# EAGLE board CAN_driver (EAGLE 9.3.1)
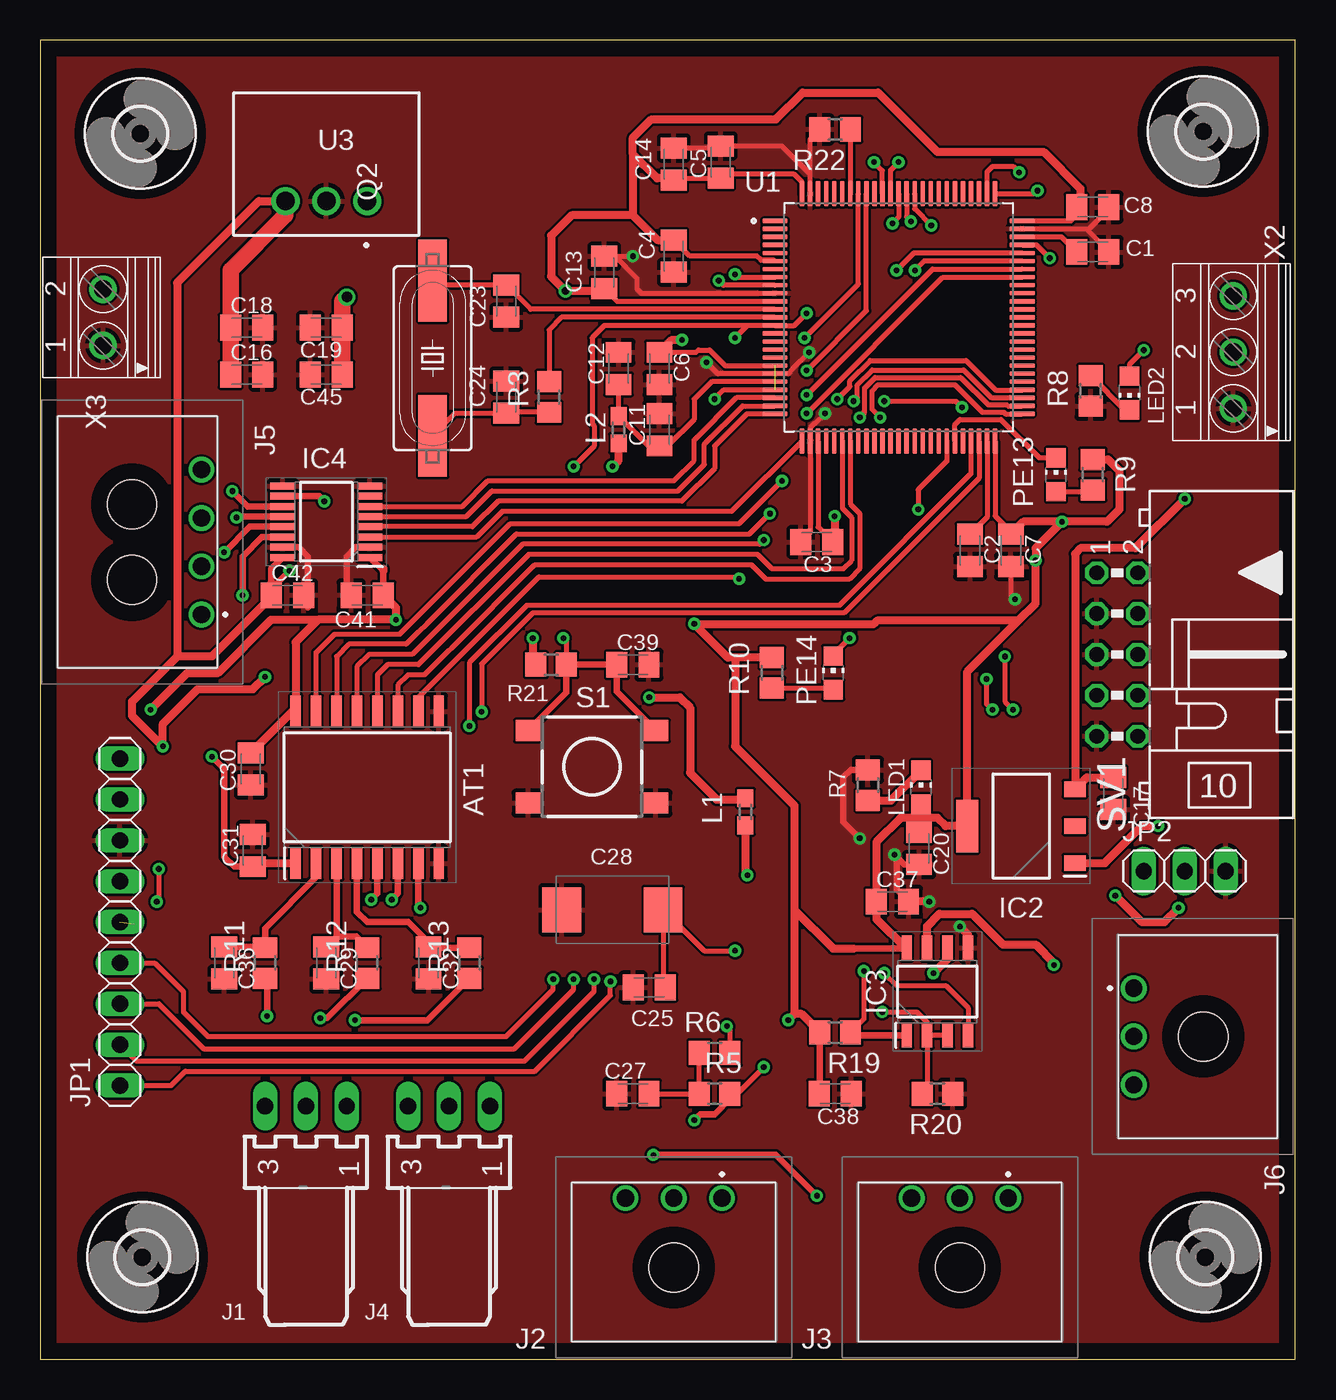
[diagram p0: board, top side]
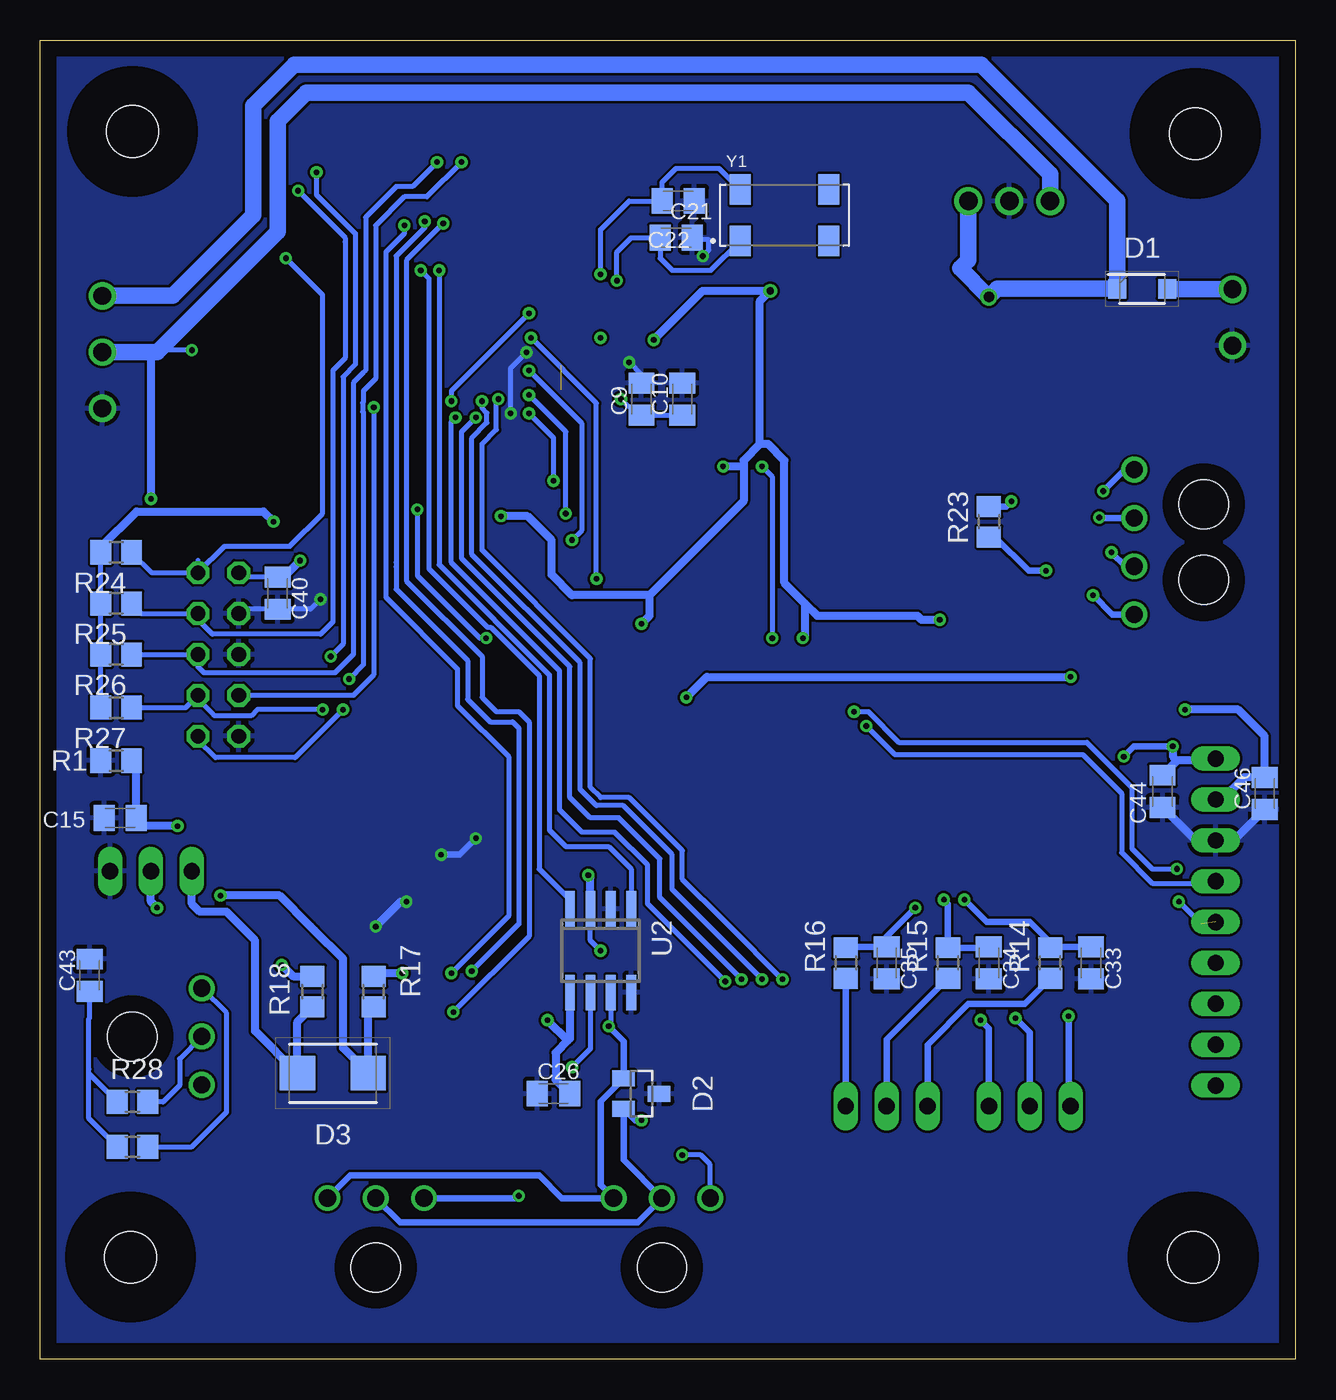
[diagram p1: board, bottom side, seen from below]

Size 78 x 82 mm. Coordinates in mm from the lower left corner, seen from the top.
Outline: 0,0 78,0 78,82 0,82 0,0
Copper layers (1*16): Top 0.035mm / dielectric 1.5mm / Bottom 0.035mm
Design rules "default": minimum track width 6mil, minimum drill 0.35mm, track to track 6mil, track to pad 6mil, pad to pad 6mil, via to via 6mil, smd to smd 6mil, copper to edge 40mil, drill to drill 6mil, minimum pad ring 10mil, minimum via ring 8mil, stop-mask expansion 4mil, vias tented up to drill 0mil, thermal gap 10mil

## Footprints (pad centres in the part's own frame; a part is rotated, then mirrored left to right if it is on the bottom)
SOIC127P1030X265-16N = smd 1.95 x 0.65: 1 -4.725,4.445; 2 -4.725,3.175; 3 -4.725,1.905; 4 -4.725,0.635; 5 -4.725,-0.635; 6 -4.725,-1.905; 7 -4.725,-3.175; 8 -4.725,-4.445; 9 4.725,-4.445; 10 4.725,-3.175; 11 4.725,-1.905; 12 4.725,-0.635; 13 4.725,0.635; 14 4.725,1.905; 15 4.725,3.175; 16 4.725,4.445
C0805K = smd 1.3 x 1.6: 1 -1,0; 2 1,0
SMC_D = smd 2.4 x 2.8: + -3.15,0; - 3.15,0
SODFL3618X143N = smd 1.12 x 1.22: 1 -1.55,0; 2 1.55,0
SOT23 = smd 1 x 1.4: 1 -0.95,-1.1; 2 0.95,-1.1; 3 0,1.1
DIONM5436X261N = smd 2.2 x 2.15: 1 -2.2,0; 2 2.2,0
SOT230P700X180-4N = smd 1.35 x 0.95: 1 -3.35,2.3; 2 -3.35,0; 3 -3.35,-2.3 | smd 1.35 x 3.25: 4 3.35,0
SOIC127P600X175-8N = smd 1.525 x 0.65: 1 -2.712,1.905; 2 -2.712,0.635; 3 -2.712,-0.635; 4 -2.712,-1.905; 5 2.712,-1.905; 6 2.712,-0.635; 7 2.712,0.635; 8 2.712,1.905
SOP64P600X175-16N = smd 1.528 x 0.435: 1 -2.711,2.222; 2 -2.711,1.588; 3 -2.711,0.952; 4 -2.711,0.318; 5 -2.711,-0.318; 6 -2.711,-0.952; 7 -2.711,-1.588; 8 -2.711,-2.222; 9 2.711,-2.222; 10 2.711,-1.588; 11 2.711,-0.952; 12 2.711,-0.318; 13 2.711,0.318; 14 2.711,0.952; 15 2.711,1.588; 16 2.711,2.222
7395-03 = drill 1.016 long: 1 2.54,0; 2 0,0; 3 -2.54,0
436500300 = drill 1.07 pad 1.605: 1 3,3.67; 2 0,3.67; 3 -3,3.67 | hole 3.05: 0,-0.65
436500400 = drill 1.07 pad 1.605: 1 4.5,3.67; 2 1.5,3.67; 3 -1.5,3.67; 4 -4.5,3.67 | hole 3.05: -2.35,-0.65; 2.35,-0.65
1X09 = drill 1.016 long: 1 -10.16,0; 2 -7.62,0; 3 -5.08,0; 4 -2.54,0; 5 0,0; 6 2.54,0; 7 5.08,0; 8 7.62,0; 9 10.16,0
1X03 = drill 1.016 long: 1 -2.54,0; 2 0,0; 3 2.54,0
L1608 = smd 1.1 x 1: 1 -0.85,0; 2 0.85,0
CHIP-LED0805 = smd 1.2 x 1.2: A 0,-1.05; C 0,1.05
SM49 = smd 5.08 x 1.778: 1 -4.826,0; 2 4.826,0
R0805 = smd 1.3 x 1.5: 1 -0.95,0; 2 0.95,0
DTSM-6 = smd 1.55 x 1.3: 1 -3.975,2.25; 2 3.975,2.25; 3 -3.975,-2.25; 4 3.975,-2.25
ML10L = drill 0.914 octagon: 1 -5.08,-1.27; 2 -5.08,1.27; 3 -2.54,-1.27; 4 -2.54,1.27; 5 0,-1.27; 6 0,1.27; 7 2.54,-1.27; 8 2.54,1.27; 9 5.08,-1.27; 10 5.08,1.27
QFP50P1600X1600X160-100N = smd 1.56 x 0.28: 1 -7.68,6; 2 -7.68,5.5; 3 -7.68,5; 4 -7.68,4.5; 5 -7.68,4; 6 -7.68,3.5; 7 -7.68,3; 8 -7.68,2.5; 9 -7.68,2; 10 -7.68,1.5; 11 -7.68,1; 12 -7.68,0.5; 13 -7.68,0; 14 -7.68,-0.5; 15 -7.68,-1; 16 -7.68,-1.5; 17 -7.68,-2; 18 -7.68,-2.5; 19 -7.68,-3; 20 -7.68,-3.5; 21 -7.68,-4; 22 -7.68,-4.5; 23 -7.68,-5; 24 -7.68,-5.5; 25 -7.68,-6; 51 7.68,-6; 52 7.68,-5.5; 53 7.68,-5; 54 7.68,-4.5; 55 7.68,-4; 56 7.68,-3.5; 57 7.68,-3; 58 7.68,-2.5; 59 7.68,-2; 60 7.68,-1.5; 61 7.68,-1; 62 7.68,-0.5; 63 7.68,0; 64 7.68,0.5; 65 7.68,1; 66 7.68,1.5; 67 7.68,2; 68 7.68,2.5; 69 7.68,3; 70 7.68,3.5; 71 7.68,4; 72 7.68,4.5; 73 7.68,5; 74 7.68,5.5; 75 7.68,6 | smd 0.28 x 1.56: 26 -6,-7.68; 27 -5.5,-7.68; 28 -5,-7.68; 29 -4.5,-7.68; 30 -4,-7.68; 31 -3.5,-7.68; 32 -3,-7.68; 33 -2.5,-7.68; 34 -2,-7.68; 35 -1.5,-7.68; 36 -1,-7.68; 37 -0.5,-7.68; 38 0,-7.68; 39 0.5,-7.68; 40 1,-7.68; 41 1.5,-7.68; 42 2,-7.68; 43 2.5,-7.68; 44 3,-7.68; 45 3.5,-7.68; 46 4,-7.68; 47 4.5,-7.68; 48 5,-7.68; 49 5.5,-7.68; 50 6,-7.68; 76 6,7.68; 77 5.5,7.68; 78 5,7.68; 79 4.5,7.68; 80 4,7.68; 81 3.5,7.68; 82 3,7.68; 83 2.5,7.68; 84 2,7.68; 85 1.5,7.68; 86 1,7.68; 87 0.5,7.68; 88 0,7.68; 89 -0.5,7.68; 90 -1,7.68; 91 -1.5,7.68; 92 -2,7.68; 93 -2.5,7.68; 94 -3,7.68; 95 -3.5,7.68; 96 -4,7.68; 97 -4.5,7.68; 98 -5,7.68; 99 -5.5,7.68; 100 -6,7.68
SO8 = smd 2.2 x 0.6: 1 -2.6,1.905; 2 -2.6,0.635; 3 -2.6,-0.635; 4 -2.6,-1.905; 5 2.6,-1.905; 6 2.6,-0.635; 7 2.6,0.635; 8 2.6,1.905
AMSR1-7805-NZ = drill 1.15 pad 1.75: 1 -2.54,-2.15; 2 0,-2.15; 3 2.54,-2.15
3,2 = hole 3.2: 0,0
1751251 = drill 1.1 pad 1.7: 1 -3.5,-0.1; 2 0,-0.1; 3 3.5,-0.1
1751248 = drill 1.1 pad 1.7: 1 -1.75,-0.1; 2 1.75,-0.1
XTAL_ECS-.327-6-17X-C-TR = smd 1.3 x 1.9: 1 -2.75,-1.6; 2 2.75,-1.6; 3 2.75,1.6; 4 -2.75,1.6

## Placement (x,y rotation side)
AT1  ISO7760DWR  [SOIC127P1030X265-16N]  20.32,35.56 90 top
C1  2,2u  [C0805K]  65.41,68.83 0 top
C2  2,2u  [C0805K]  57.78,50.29 270 top
C3  100n  [C0805K]  48.26,50.8 180 top
C4  100n  [C0805K]  39.37,68.58 270 top
C5  100n  [C0805K]  42.29,74.42 90 top
C6  100n  [C0805K]  38.48,61.59 270 top
C7  100n  [C0805K]  60.33,50.29 270 top
C8  100n  [C0805K]  65.41,71.63 0 top
C9  100n  [C0805K]  40.64,59.69 90 bottom
C10  1u  [C0805K]  38.1,59.69 90 bottom
C11  100n  [C0805K]  38.48,57.78 90 top
C12  1u  [C0805K]  35.94,61.59 90 top
C13  100n  [C0805K]  35.05,67.56 90 top
C14  10u  [C0805K]  39.37,74.3 90 top
C15  20p  [C0805K]  73.03,33.66 180 bottom
C16  10u  [C0805K]  12.83,61.21 0 top
C17  1u  [C0805K]  66.67,35.18 270 top
C18  10n  [C0805K]  12.83,64.14 0 top
C19  10u  [C0805K]  17.78,64.14 180 top
C20  2,2u  [C0805K]  54.61,31.75 270 top
C21  6,8p  [C0805K]  38.48,69.72 0 bottom
C22  6,8p  [C0805K]  38.35,72.01 0 bottom
C23  22p  [C0805K]  28.96,65.79 90 top
C24  22p  [C0805K]  28.96,59.82 270 top
C25  100nF  [C0805K]  37.85,23.11 0 top
C26  100nF  [C0805K]  46.1,16.51 0 bottom
C27  4.7nF  [C0805K]  36.83,16.51 180 top
C28  22uF / 16V  [SMC_D]  35.56,27.94 180 top
C29  220p  [C0805K]  17.78,24.64 270 top
C30  100n  [C0805K]  13.08,36.7 270 top
C31  100n  [C0805K]  13.21,31.62 90 top
C32  220p  [C0805K]  24.13,24.64 270 top
C33  220p  [C0805K]  12.7,24.64 270 bottom
C34  220p  [C0805K]  19.05,24.64 270 bottom
C35  220p  [C0805K]  25.4,24.64 270 bottom
C36  220p  [C0805K]  11.43,24.64 270 top
C37  100n  [C0805K]  52.96,28.45 0 top
C38  100n  [C0805K]  49.4,16.51 0 top
C39  100n  [C0805K]  36.83,43.18 0 top
C40  100n  [C0805K]  63.25,47.62 270 bottom
C41  100n  [C0805K]  20.32,47.5 180 top
C42  100n  [C0805K]  15.37,47.5 0 top
C43  4.7nF  [C0805K]  74.93,23.88 90 bottom
C44  100n  [C0805K]  8.26,35.31 90 bottom
C45  10n  [C0805K]  17.78,61.21 180 top
C46  100n  [C0805K]  1.91,35.18 90 bottom
D1  SS34FA  [SODFL3618X143N]  9.53,66.55 0 bottom
D2  PESD1CAN  [SOT23]  40.64,16.51 270 bottom
D3  SMBJ43CA  [DIONM5436X261N]  59.82,17.78 180 bottom
IC2  LT3080EST#PBF  [SOT230P700X180-4N]  60.96,33.15 180 top
IC3  SN65HVD1781AQDRQ1  [SOIC127P600X175-8N]  55.75,22.86 90 top
IC4  ISO7740DBQ  [SOP64P600X175-16N]  17.78,52.07 180 top
J1  22-05-7038-03  [7395-03]  16.51,15.75 0 top
J2  43650-0300  [436500300]  39.37,6.35 0 top
J3  43650-0300  [436500300]  57.15,6.35 0 top
J4  22-05-7038-03  [7395-03]  25.4,15.75 0 top
J5  43650-0400  [436500400]  6.35,50.8 270 top
J6  43650-0300  [436500300]  71.63,20.07 90 top
JP1  [1X09]  4.95,27.18 90 top
JP2  [1X03]  71.12,30.35 0 top
L1  BLM18PG600  [L1608]  43.81,34.04 90 top
L2  BLM18PG600  [L1608]  35.94,57.78 90 top
LED1  [CHIP-LED0805]  54.74,35.56 0 top
LED2  [CHIP-LED0805]  67.69,60.07 180 top
PE13  [CHIP-LED0805]  63.12,54.99 0 top
PE14  [CHIP-LED0805]  49.28,42.67 0 top
Q2  16MHz  [SM49]  24.38,62.23 270 top
R1  330k  [R0805]  73.28,37.21 0 bottom
R3  220  [R0805]  31.62,59.82 90 top
R5  62  [R0805]  41.91,16.51 0 top
R6  62  [R0805]  41.91,19.05 0 top
R7  510  [R0805]  51.44,35.69 270 top
R8  510  [R0805]  65.28,60.2 90 top
R9  510  [R0805]  65.41,54.99 90 top
R10  510  [R0805]  45.47,42.67 90 top
R11  2k  [R0805]  13.97,24.64 90 top
R12  2k  [R0805]  20.32,24.64 90 top
R13  2k  [R0805]  26.67,24.64 90 top
R14  2k  [R0805]  15.24,24.64 90 bottom
R15  2k  [R0805]  21.59,24.64 90 bottom
R16  2k  [R0805]  27.94,24.64 90 bottom
R17  10k  [R0805]  57.28,22.86 270 bottom
R18  10k  [R0805]  61.09,22.86 270 bottom
R19  10k  [R0805]  49.4,20.32 180 top
R20  10k  [R0805]  55.75,16.51 180 top
R21  10k  [R0805]  31.75,43.18 180 top
R22  510  [R0805]  49.4,76.45 180 top
R23  4,7k  [R0805]  19.05,52.07 270 bottom
R24  10k  [R0805]  73.28,50.16 180 bottom
R25  10k  [R0805]  73.28,46.99 180 bottom
R26  10k  [R0805]  73.28,43.81 180 bottom
R27  10k  [R0805]  73.28,40.51 180 bottom
R28  62  [R0805]  72.26,16 0 bottom
R29  62  [R0805]  72.26,13.21 0 bottom
S1  DTSM-6  [DTSM-6]  34.29,36.83 0 top
SV1  [ML10L]  66.93,43.81 270 top
U1  STM32F407VGT6  [QFP50P1600X1600X160-100N]  53.34,64.77 0 top
U2  TLE7251VSO8  [SO8]  43.18,25.4 270 bottom
U3  AMSR1-7805-NZ  [AMSR1-7805-NZ]  17.78,69.85 180 top
U$5  [3,2]  6.22,76.2 0 top
U$6  [3,2]  72.26,76.33 0 top
U$7  [3,2]  72.39,6.35 0 top
U$8  [3,2]  6.35,6.35 0 top
X2  1751251  [1751251]  74.04,62.61 90 top
X3  1751248  [1751248]  3.81,64.77 90 top
Y1  ECS-.327-6-17X-C-TR  [XTAL_ECS-.327-6-17X-C-TR]  31.75,71.12 0 bottom

## Library data of the parts
AT1 = SamacSys_Parts; DESCRIPTION: High Speed, Robust EMC Six-Channel Digital Isolators; HEIGHT: 2.65mm; MANUFACTURER_NAME: Texas Instruments; MANUFACTURER_PART_NUMBER: ISO7760DWR; MOUSER_PART_NUMBER: 595-ISO7760DWR; MOUSER_PRICE-STOCK: https://www.mouser.com/Search/Refine.aspx?Keyword=595-ISO7760DWR
C1-C46 = rcl; SPICEPREFIX: C
D1 = SamacSys_Parts; DESCRIPTION: ON SEMICONDUCTOR - SS34FA - SCHOTTKY RECT, AEC-Q101, 40V, SOD-123FA; HEIGHT: 1.43mm; MANUFACTURER_NAME: ON Semiconductor; MANUFACTURER_PART_NUMBER: SS34FA; MOUSER_PART_NUMBER: 512-SS34FA; MOUSER_PRICE-STOCK: https://www.mouser.com/Search/Refine.aspx?Keyword=512-SS34FA
D2 = diode
D3 = SamacSys_Parts; DESCRIPTION: Littelfuse SMBJ43CA, Bi-Directional TVS Diode, 600W, 2-Pin DO-214AA; HEIGHT: 2.61mm; MANUFACTURER_NAME: LITTELFUSE; MANUFACTURER_PART_NUMBER: SMBJ43CA; MOUSER_PART_NUMBER: 576-SMBJ43CA; MOUSER_PRICE-STOCK: https://www.mouser.com/Search/Refine.aspx?Keyword=576-SMBJ43CA
IC2 = SamacSys_Parts; DESCRIPTION: Adjust single Resistor 1.1A LDO LT3080 LT3080EST#PBF, Low Dropout Voltage Regulator, Adjustable 1.1A, 0 30 V, 4-Pin SOT-223; HEIGHT: 1.8mm; MANUFACTURER_NAME: Linear Technology; MANUFACTURER_PART_NUMBER: LT3080EST#PBF; MOUSER_PART_NUMBER: 584-LT3080EST#PBF; MOUSER_PRICE-STOCK: https://www.mouser.com/Search/Refine.aspx?Keyword=584-LT3080EST%23PBF
IC3 = SamacSys_Parts; DESCRIPTION: Automotive, Fault-Protected RS-485 Transceivers With 3.3-V to 5-V Operation; HEIGHT: 1.75mm; MANUFACTURER_NAME: Texas Instruments; MANUFACTURER_PART_NUMBER: SN65HVD1781AQDRQ1; MOUSER_PART_NUMBER: 595-N65HVD1781AQDRQ1; MOUSER_PRICE-STOCK: https://www.mouser.com/Search/Refine.aspx?Keyword=595-N65HVD1781AQDRQ1
IC4 = SamacSys_Parts; DESCRIPTION: High-Speed, Low-Power, Robust EMC Quad-Channel Digital Isolator; HEIGHT: 1.75mm; MANUFACTURER_NAME: Texas Instruments; MANUFACTURER_PART_NUMBER: ISO7740DBQ; MOUSER_PART_NUMBER: 595-ISO7740DBQ; MOUSER_PRICE-STOCK: https://www.mouser.com/Search/Refine.aspx?Keyword=595-ISO7740DBQ
J1 J4 = con-molex; MF: MOLEX; OC_FARNELL: unknown; OC_NEWARK: unknown
J2 J3 J6 = SamacSys_Parts; DESCRIPTION: MICRO-FIT (3.0) SINGLE ROW/RIGHT ANGLE THRU HOLD/PEGS/TRAY; HEIGHT: 5mm; MANUFACTURER_NAME: Molex; MANUFACTURER_PART_NUMBER: 43650-0300; MOUSER_PART_NUMBER: 538-43650-0300; MOUSER_PRICE-STOCK: https://www.mouser.com/Search/Refine.aspx?Keyword=538-43650-0300
J5 = SamacSys_Parts; DESCRIPTION: Molex MICRO-FIT 3.0 Series, Series Number 43650, 3mm Pitch 4 Way 1 Row Right Angle PCB Header, Solder Termination, 5A; HEIGHT: mm; MANUFACTURER_NAME: Molex; MANUFACTURER_PART_NUMBER: 43650-0400; MOUSER_PART_NUMBER: 538-43650-0400; MOUSER_PRICE-STOCK: https://www.mouser.com/Search/Refine.aspx?Keyword=538-43650-0400
JP1 JP2 = pinhead
L1 L2 = PDFerr
LED1 LED2 PE13 PE14 = led
Q2 = crystal; OC_FARNELL: unknown; OC_NEWARK: unknown
R1 R3 R5-R29 = rcl; SPICEPREFIX: R
S1 = switch-tact
SV1 = con-harting-ml; OC_FARNELL: unknown; OC_NEWARK: unknown
U1 = STM32F407VGT6; AVAILABILITY: Unavailable; DESCRIPTION: STM32 Series 32-bit 1 MB Flash 192 kB RAM ARM Based Microcontroller - LQFP-100; MF: STMicroelectronics; MP: STM32F407VGT6; PACKAGE: LQFP-100 STMicroelectronics; PRICE: None
U2 = TLE7251
U3 = AMSR1-7805-NZ; DESCRIPTION: Up to 12 Watt | DC-DC Switching Regulator; HEIGHT: mm; MANUFACTURER_NAME: AIM; MANUFACTURER_PART_NUMBER: AMSR1-7805-NZ
U$5-U$8 = holes
X2 X3 = con-phoenix-350; OC_FARNELL: unknown; OC_NEWARK: unknown
Y1 = ECS-.327-6-17X-C-TR; AVAILABILITY: Unavailable; DESCRIPTION: ECX306X Series 32.76 kHz ±10 ppm 6 pF -40 to +85 °C Surface Mount Crystal; MF: ECS Inc.; MP: ECS-.327-6-17X-C-TR; PACKAGE: 4-4 ECS International; PRICE: None

## Nets
+3V3: AT1.16 C3.1 C4.1 C5.1 C6.1 C7.1 C8.1 C9.1 C10.1 C13.1 C14.1 C20.1 C26.2 C30.1 C37.1 C38.1 C40.1 C41.1 C46.2 IC2.4 IC3.8 IC4.1 JP1.8 L2.1 LED1.A R9.2 R10.2 R19.2 R21.2 R24.2 R25.2 R26.2 R27.2 SV1.1 U1.6 U1.11 U1.19 U1.22 U1.28 U1.50 U1.75 U1.100 U2.5
+5V: AT1.1 C16.1 C17.1 C18.1 C31.1 C42.1 C44.2 IC2.3 IC4.16 JP1.9 L1.2 LED2.A R23.2 U3.3 X2.2
+12V: C19.1 C45.1 D1.1 U3.1 X2.3
BLUE_RXD: JP1.5 U1.48
BLUE_TXD: JP1.6 U1.47
CAN_H: D2.1 J2.1 J3.1 R6.2 U2.7
CAN_L: D2.2 J2.2 J3.2 R5.2 U2.6
CAN_RXD: U1.70 U2.4
CAN_TXD: U1.71 U2.1
CANH_TR: J6.1 R29.2
CANL_TR: J6.2 R28.2
EN1A: AT1.2 C36.1 R11.2
EN1B: AT1.3 C29.1 R12.2
EN1C: AT1.4 C32.1 R13.2
EN2A: AT1.5 C33.1 R14.2
EN2B: AT1.6 C34.1 R15.2
EN2C: AT1.7 C35.1 R16.2
GND: AT1.8 AT1.9 C1.2 C2.2 C3.2 C4.2 C5.2 C6.2 C7.2 C8.2 C9.2 C10.2 C11.2 C12.2 C13.2 C14.2 C15.2 C16.2 C17.2 C18.2 C19.2 C20.2 C21.2 C22.2 C23.1 C24.1 C25.1 C26.1 C27.2 C28.- C29.2 C30.2 C31.2 C32.2 C33.2 C34.2 C35.2 C36.2 C37.2 C38.2 C39.2 C40.2 C41.2 C42.2 C43.2 C44.1 C45.2 C46.1 D2.3 IC3.5 IC4.2 IC4.8 IC4.9 IC4.15 JP1.7 JP2.3 R1.1 R7.1 R8.1 R20.1 R22.2 S1.3 S1.4 SV1.3 SV1.5 SV1.9 U1.10 U1.20 U1.27 U1.74 U1.99 U2.2 U2.8 U3.2 X2.1 X3.1
LED1: PE13.C U1.45
LED2: PE14.C U1.44
MCU_EN1A: AT1.15 U1.68
MCU_EN1B: AT1.14 U1.69
MCU_EN1C: AT1.13 U1.92
MCU_EN2A: AT1.12 U1.31
MCU_EN2B: AT1.11 U1.32
MCU_EN2C: AT1.10 U1.93
N$1: C1.1 U1.73
N$2: C2.1 U1.49
N$3: C22.1 U1.8 Y1.4
N$4: C11.1 C12.1 L2.2 U1.21
N$5: C21.1 U1.9 Y1.1
N$6: D1.2 X3.2
N$7: C15.1 IC2.1 R1.2
N$9: R3.2 U1.13
N$10: C23.2 Q2.1 U1.12
N$11: J2.3 J3.3
N$12: C24.2 Q2.2 R3.1
N$13: LED1.C R7.2
N$14: LED2.C R8.2
N$15: PE13.A R9.1
N$16: PE14.A R10.1
N$17: J1.3 R11.1
N$20: J1.2 R12.1
N$21: IC3.7 R18.1
N$22: J1.1 R13.1
N$23: IC3.6 R17.1
N$24: J4.3 R14.1
N$25: R22.1 U1.94
N$26: J4.2 R15.1
N$27: IC4.10 R23.1
N$28: J4.1 R16.1
N$29: IC4.13 J5.2
N$30: IC4.12 J5.3
N$31: IC4.14 J5.1
N$32: IC4.11 J5.4
N$33: C43.1 R28.1 R29.1
N$59: C27.1 R5.1 R6.1
N$113: C25.2 C28.+ L1.1 U2.3
NRST: C39.1 R21.1 S1.1 S1.2 SV1.7 U1.14
PWM1: IC4.3 U1.26
PWM2: IC4.4 U1.25
PWM3: IC4.5 U1.24
PWM4: IC4.6 U1.23
RS485_A: D3.1 JP2.2 R17.2
RS485_B: D3.2 JP2.1 R18.2
SPI_MISO: JP1.3 U1.53
SPI_MOSI: JP1.4 U1.54
SPI_NSS: JP1.1 U1.51
SPI_SCK: JP1.2 U1.52
TCK/SWCLK: R25.1 SV1.4 U1.76
TDI: R27.1 SV1.8 U1.77
TDO/SWO: R26.1 SV1.6 U1.89
TMS/SWDIO: R24.1 SV1.2 U1.72
TRST: SV1.10 U1.90
UART_DIR: IC3.2 IC3.3 R20.2 U1.88
UART_RXD: IC3.1 R19.1 U1.87
UART_TXD: IC3.4 U1.86

## Tracks (layer width: path | path; a pad name or v marks a point on that pad's centre or on a via)
+3V3  (via drill 0.35, 0.35 pad 0.55, 0.45)  (1 unrouted)
  Top 0.305: C13.1 35.85,65.77 U1.11 | U1.6 45.6,68.33 44.8,68.33 44.54,68.58 40.37,68.58 C4.1 | U1.28 48.34,51.72 C3.1 | v41.91,59.69 42.49,60.27 U1.22 | C6.1 40.75,62.59 40.89,62.74 41.61,62.74 42.57,61.77 U1.19 | 42.16,73.3 C5.1 41.91,73.42 | AT1.16 15.83,40.24 | 21.34,48.75 21.32,48.74 C41.1 | C14.1 39.5,73.42 41.91,73.42 | U1.100 47.34,73.18 46.86,73.66 42.15,73.66 41.91,73.42 | U1.50 59.34,52.42 60.4,51.36 | U1.75 64.06,70.77 64.4,71.11 64.4,71.62 C8.1
  Top 0.406: C41.1 21.32,49.02 IC4.1 | R19.2 48.45,16.56 C38.1 | 50.55,25.53 53.8,25.53 IC3.8
  Top 0.508: C6.1 39.26,63.37 v39.88,63.37 | 30.48,43.5 R21.2 30.61,43.37 v30.61,44.83 | 21.32,49.13 21.32,49.02 | v49.37,52.41 49.37,50.91 C3.1 | 46.86,27.94 49.28,25.53 50.55,25.53 | C13.1 34.91,66.42 v32.64,66.42 31.75,67.31 31.75,69.85 33.02,71.12 36.83,71.12 | C41.1 22.1,46.72 v22.1,45.97 17.27,45.97 | 39.5,73.42 38.34,73.42 36.83,74.93 | 36.83,74.93 36.83,71.12 | 36.83,71.12 38.37,69.58 C4.1 | 36.83,74.93 36.83,75.95 37.97,77.09 45.72,77.09 47.37,78.74 52.07,78.74 55.75,75.06 62.36,75.06 64.64,72.77 64.64,71.36 64.4,71.11 | 60.47,51.44 60.4,51.36 C7.1 61.1,52.07 v63.5,52.07 | R10.2 43.18,43.62 | 43.18,43.62 42.74,43.62 v40.64,45.72 51.82,45.72 52.01,45.91 60.77,45.91 | 46.86,27.94 46.86,21.46 | 46.86,21.46 v46.48,21.08 | R19.2 47.31,21.46 46.86,21.46 | 43.18,43.62 43.18,38.1 46.86,34.42 46.86,27.94 | 17.27,45.97 15.88,44.58 15.88,40.5 | 15.88,40.5 AT1.16 | C30.1 15.88,40.5 | v6.86,40.39 9.14,42.67 11.05,42.67 14.35,45.97 17.27,45.97 | v63.5,52.07 61.85,50.42 v61.85,49.66 61.85,46.99 60.77,45.91 | 53.8,25.53 51.96,27.37 C37.1 51.96,32.15 53.47,33.66 54.61,33.66 | R9.2 66.36,55.94 67.06,55.24 67.06,52.83 66.29,52.07 v63.5,52.07 | 54.61,33.66 55.75,33.66 56.26,33.15 IC2.4 57.61,42.75 60.77,45.91 | 54.61,33.66 C20.1 | 54.61,33.66 54.74,33.78 LED1.A | v35.56,55.5 35.94,55.88 L2.1
  Bottom 0.305: v41.91,59.69 40.91,58.69 C9.1 C10.1 | R27.2 R26.2 R25.2 R24.2 | C40.1 65.39,48.62 SV1.1
  Bottom 0.508: 30.48,46.99 29.72,46.23 23.5,46.23 23.24,45.97 v22.1,45.97 | 34.29,55.5 34.29,55.88 33.27,56.9 | 34.29,55.5 34.29,53.34 40.13,47.5 | 40.13,47.5 44.96,47.5 46.23,48.77 46.23,50.93 47.71,52.41 v49.37,52.41 | R24.2 74.23,50.48 72.01,52.7 64.14,52.7 v63.5,52.07 | v40.64,45.72 40.13,46.23 40.13,47.5 | v30.61,44.83 30.48,44.96 30.48,46.99 | U2.5 45.09,19.94 45.21,19.81 | 45.21,19.81 45.97,19.05 45.97,17.38 C26.2 | v46.48,21.08 45.21,19.81 | 30.48,46.99 31.75,48.26 31.75,55.88 32.77,56.9 33.27,56.9 | 33.27,56.9 33.27,65.79 v32.64,66.42 36.83,66.42 v39.88,63.37 | v6.86,40.39 3.56,40.39 1.91,38.73 C46.2 3.19,36.18 4.57,34.8 JP1.8 | v61.85,49.66 62.88,48.62 C40.1 | 34.29,55.5 v35.56,55.5
+5V  (via drill 0.35)
  Top 0.305: LED2.A 67.69,61.85 v68.58,62.74
  Top 0.406: IC4.16 14.37,49.15 14.37,48.26 C42.1 14.37,47.9 v15.49,49.02 | v10.67,37.47 11.43,36.7 11.43,31.24 12.05,30.62 C31.1
  Top 0.508: C42.1 13.97,47.1 | AT1.1 13.42,30.84 C31.1 | 14.37,48.26 14.37,47.39 10.67,43.69 8.51,43.69 | 43.94,35.01 L1.2 43.73,34.8 42.04,34.8 40.39,36.45 40.39,40.51 39.75,41.15 v37.85,41.15 | 8.51,43.69 8.51,66.93 13.58,72 U3.3 | 8.51,43.69 5.71,40.89 5.71,40.01 v7.62,38.1 7.62,39.5 9.78,41.66 13.21,41.66 v13.97,42.42 | v71.12,53.49 68.05,50.42 64.64,50.42 64.31,50.09 IC2.3 65.04,36.18 C17.1
  Top 1.016: U3.3 15.24,71.12 11.83,67.71 C18.1 C16.1
  Bottom 0.305: v68.58,62.74 70.99,62.74 71.12,62.61
  Bottom 0.406: R23.2 18.67,51.12 16.57,49.02 v15.49,49.02 | v7.62,38.1 10.03,38.1 v10.67,37.47
  Bottom 0.508: C44.2 7.35,37.21 | v7.62,38.1 7.62,37.48 7.35,37.21 | v37.85,41.15 36.58,42.42 v13.97,42.42 | 71.12,62.61 v71.12,53.49 | JP1.9 5.08,37.21 7.35,37.21
  Bottom 1.016: X2.2 71.12,62.61 70.74,62.61 63.25,70.1 63.25,76.96 61.47,78.74 20.32,78.74 15.24,73.66 U3.3
+12V  (via drill 0.65)
  Top 1.016: v19.05,66.04 18.78,65.77 C19.1 C45.1
  Bottom 1.016: X2.3 69.78,66.11 64.77,71.12 64.77,77.94 62.23,80.48 19.52,80.48 11.07,72.03 D1.1 18.54,66.55 v19.05,66.04 20.83,67.82 20.32,68.33 U3.1
BLUE_RXD  (via drill 0.35)  (1 unrouted)
  Top 0.305: U1.48 58.34,54.78 49.96,46.41 30.61,46.41 27.43,43.23 v27.43,40.26 | v7.37,30.48 7.37,28.57 v7.24,28.45
  Bottom 0.305: v27.43,40.26 26.54,40.26 24.64,38.35 12.95,38.35 10.16,35.56 10.16,31.75 8.89,30.48 v7.37,30.48 7.62,30.48 | v7.24,28.45 5.84,27.05
BLUE_TXD  (via drill 0.35)
  Top 0.305: U1.47 57.84,55.05 49.66,46.86 30.23,46.86 26.67,43.31 v26.67,39.37
  Bottom 0.305: v26.67,39.37 24.89,37.59 13.21,37.59 10.79,35.18 10.79,31.5 8.89,29.59 5.08,29.59 JP1.6
CAN_H  (via drill 0.35)
  Top 0.305: v42.67,20.7 42.86,20.51 R6.2
  Bottom 0.305: U2.7 42.55,20.83 v42.67,20.7
  Bottom 0.406: J3.1 58.74,11.43 46.99,11.43 45.58,10.02 J2.1 43.18,10.83 43.18,16.02 D2.1 41.74,19.77 v42.67,20.7
CAN_L  (via drill 0.35)
  Top 0.305: v44.96,18.16 43.31,16.51 R5.2
  Top 0.406: v40.64,14.86 41.02,15.24 41.91,15.24 42.86,16.19 R5.2
  Bottom 0.305: U2.6 43.81,19.3 v44.96,18.16
  Bottom 0.406: J3.2 55.64,8.51 40.88,8.51 J2.2 41.74,12.39 D2.2 41.04,14.86 v40.64,14.86
CAN_RXD  (via drill 0.35)
  Top 0.305: U1.70 54.94,68.27 v54.36,67.69
  Bottom 0.305: v54.36,67.69 53.85,67.18 53.85,49.15 50.21,45.51 50.01,45.51 46.99,42.49 46.99,30.48 45.09,28.57 U2.4
CAN_TXD  (via drill 0.35)
  Top 0.305: U1.71 54.29,68.77 v53.21,67.69
  Bottom 0.305: v53.21,67.69 53.21,49.4 46.35,42.55 46.35,32.89 45.34,31.88 42.67,31.88 41.27,30.48 U2.1
CANH_TR
  Bottom 0.305: R29.2 68.58,13.21 66.42,15.37 66.42,21.53 J6.1
CANL_TR
  Bottom 0.305: J6.2 69.34,18.68 69.34,17.02 70.36,16 R28.2
EN1A
  Top 0.406: 13.97,25.78 R11.2 | R11.2 13.92,25.64 C36.1 | AT1.2 17.14,29.97 13.97,26.8 R11.2
EN1B
  Top 0.406: 18.41,26.27 18.41,26.67 18.41,27.18 AT1.3 | 18.41,26.27 C29.1 | R12.2 19.64,26.27 18.41,26.27
EN1C
  Top 0.406: AT1.4 19.68,27.81 20.32,27.18 22.86,27.18 24.13,25.91 C32.1 24.18,25.59 R13.2
EN2A  (via drill 0.35)
  Top 0.406: AT1.5 20.95,28.96 v20.57,28.57
  Bottom 0.406: C33.1 15.19,25.64 R14.2 15.24,25.91 16.51,27.18 19.18,27.18 v20.57,28.57
EN2B  (via drill 0.35)
  Top 0.406: AT1.6 22.23,28.96 v21.84,28.57
  Bottom 0.406: C34.1 19.1,25.59 R15.2 21.59,28.32 v21.84,28.57
EN2C  (via drill 0.35)
  Top 0.406: v23.62,28.07 23.5,28.19 AT1.7
  Bottom 0.406: v23.62,28.07 25.4,26.29 C35.1 27.89,25.64 R16.2
GND  (via drill 0.35, 0.35 pad 0.55)
  Top 0.305: U1.10 37.36,66.27 37.08,66.55 37.08,67.18 35.7,68.56 C13.2 36.81,68.56 v36.83,68.58 | 66.41,71.36 66.41,71.5 | 66.41,71.5 C8.2 | C3.2 47.84,51.38 U1.27 47.88,57.13 47.88,57.94 48.12,58.17 48.14,58.17 v48.77,58.8 | v41.4,61.98 42.11,61.27 U1.20 46.47,61.27 46.74,61.55 v47.78,62.59 | 47.88,72.49 U1.99 47.84,73.66 | 47.84,73.66 47.84,75.84 R22.2 | 47.84,73.66 46.08,75.42 C5.2 42.16,75.3 C14.2 | C7.2 60.33,47.5 v60.58,47.24 | U1.74 64.97,70.27 | 64.97,70.27 65.17,70.27 66.41,71.5 | 64.97,70.27 C1.2
  Top 0.406: IC4.15 16.07,50.48 16.64,49.91 16.64,46.74 16.37,47.01 C42.2 | C41.2 19.05,47.77 19.05,49.91 19.62,50.48 IC4.2 | C20.2 53.7,30.75 53.21,31.24 | 53.21,31.24 v53.09,31.37 | C37.2 53.21,29.19 53.21,31.24 | R7.1 50.35,36.64 49.91,36.2 49.91,33.4 v50.93,32.38
  Top 0.508: IC3.5 57.66,26.39 v57.15,26.9 | v55.24,28.45 C37.2
  Bottom 0.305: v41.4,61.98 40.64,61.21 C9.2 | SV1.3 65.39,46.62 C40.2 61.2,46.62 v60.58,47.24 | v36.83,68.58 36.45,68.96 36.45,69.6 37.35,69.6 C21.2 | v48.77,58.8 48.77,61.6 v47.78,62.59
  Bottom 0.406: v50.93,32.38 51.94,31.37 v53.09,31.37
  Bottom 0.508: v57.15,26.9 55.6,28.45 v55.24,28.45 | C46.1 3.83,32.26 JP1.7 6.21,32.26 C44.1
  pour Top: -2.54,-2.54 -2.54,85.09 81.28,85.09 81.28,-2.54
  pour Bottom: -1.27,-1.27 -1.27,83.82 80.01,83.82 80.01,-1.27
LED1
  Top 0.305: U1.45 56.84,58.11 57.15,58.42 59.69,58.42 62.07,56.04 PE13.C
LED2  (via drill 0.35)
  Top 0.305: U1.44 56.34,55.83 54.56,54.05 v54.56,52.83 | 48.9,44.1 PE14.C | PE14.C 49.24,43.72 | 49.56,43.72 PE14.C | v50.29,44.83 49.28,43.81 PE14.C
  Bottom 0.305: v54.56,52.83 54.56,48.72 50.67,44.83 v50.29,44.83
MCU_EN1A  (via drill 0.35)
  Top 0.305: v46.1,54.61 43.43,51.94 29.21,51.94 22.35,45.09 18.29,45.09 17.14,43.94 AT1.15 | v47.62,58.8 56.09,67.27 U1.68
  Bottom 0.305: v46.1,54.61 46.1,57.28 v47.62,58.8
MCU_EN1B  (via drill 0.35)
  Top 0.305: v45.34,52.58 44.07,51.31 29.59,51.31 24.07,45.78 23.5,45.21 22.73,44.45 19.18,44.45 18.41,43.69 AT1.14 | v47.62,59.94 55.45,67.77 U1.69
  Bottom 0.305: v45.34,52.58 45.34,57.66 v47.62,59.94
MCU_EN1C  (via drill 0.35)
  Top 0.305: v44.96,50.93 44.7,50.67 29.97,50.67 23.11,43.81 20.45,43.81 19.68,43.05 AT1.13 | v47.62,61.47 51.34,65.18 U1.92
  Bottom 0.305: v44.96,50.93 44.32,51.56 44.32,58.17 v47.62,61.47
MCU_EN2A
  Top 0.305: U1.31 49.84,52.9 50.42,52.32 50.42,49.66 49.91,49.15 45.47,49.15 44.58,50.04 30.35,50.04 23.5,43.18 21.59,43.18 20.95,42.55 AT1.12
MCU_EN2B
  Top 0.305: U1.32 50.34,53.16 50.93,52.58 50.93,49.15 50.29,48.51 45.09,48.51 44.2,49.4 30.73,49.4 25.59,44.26 25.4,44.07 23.88,42.55 22.86,42.55 22.23,41.91 AT1.11
MCU_EN2C  (via drill 0.35)
  Top 0.305: v43.43,48.51 43.31,48.64 30.99,48.64 23.5,41.15 AT1.10 | v47.5,63.5 50.84,66.84 U1.93
  Bottom 0.305: v43.43,48.51 43.43,59.44 v47.5,63.5
N$1
  Top 0.305: 64.33,68.75 C1.1 63.47,69.77 U1.73
N$2
  Top 0.305: U1.49 58.84,52.35 C2.1
N$3  (via drill 0.35 pad 0.55)
  Top 0.305: U1.8 43.36,67.27 v43.18,67.45
  Bottom 0.305: Y1.4 34.87,73.08 35.17,73.39 35.82,74.04 38.48,74.04 39.35,73.17 C22.1 41.4,72.01 43.18,70.23 v43.18,67.45
N$4
  Top 0.305: U1.21 41.72,60.77 40.64,59.69 40.64,58.42 39.01,56.78 C11.1 37.79,56.78 L2.2 C12.1
N$5  (via drill 0.35 pad 0.55)
  Top 0.305: U1.9 42.45,66.77 v42.16,67.06
  Bottom 0.305: v42.16,67.06 42.16,68.83 41.27,69.72 C21.1 39.48,68.44 38.73,67.69 36.33,67.69 Y1.1
N$6
  Bottom 1.016: D1.2 7.95,66.52 X3.2
N$7  (via drill 0.35)
  Top 0.508: IC2.1 66.15,30.85 68.45,33.15 v69.47,33.15
  Bottom 0.508: v69.47,33.15 71.52,33.15 C15.1 72.03,36.91 R1.2
N$9
  Top 0.305: U1.13 32.38,64.77 31.62,64.01 R3.2
N$10
  Top 0.305: 24.78,66.66 Q2.1 24.65,66.79 C23.2 | C23.2 29.23,66.79 | U1.12 30.47,65.27 C23.2
N$11  (via drill 0.35)
  Top 0.406: v48.26,10.16 45.72,12.7 v38.1,12.7
  Bottom 0.305: J2.3 36.37,12.11 36.96,12.7 v38.1,12.7
  Bottom 0.406: J3.3 48.4,10.02 v48.26,10.16
N$12
  Top 0.305: 24.38,59.69 Q2.2 25.8,58.82 C24.2 | C24.2 28.69,58.55 | 29.55,58.82 C24.2 | R3.1 29.01,58.87 C24.2
N$13
  Top 0.508: R7.2 52.86,34.74 LED1.C
N$14
  Top 0.305: R8.2 67.41,59.02 LED2.C
N$15
  Top 0.305: PE13.A 65.31,53.94 R9.1
N$16
  Top 0.305: 45.57,41.62 R10.1 49.18,41.72 PE14.A
N$17  (via drill 0.35)
  Top 0.406: v14.1,21.34 14.1,23.56 R11.1
  Bottom 0.406: J1.3 14.1,15.88 v14.1,21.34
N$20  (via drill 0.35)
  Top 0.406: R12.1 17.84,21.21 v17.4,21.21
  Bottom 0.406: v17.4,21.21 16.51,20.32 J1.2
N$21  (via drill 0.35)
  Top 0.508: IC3.7 55.12,26.92 55.88,27.69 57.91,27.69 59.82,25.78 61.85,25.78 62.99,24.64 v62.99,24.51
  Bottom 0.508: v62.99,24.51 62.29,23.81 R18.1
N$22  (via drill 0.35)
  Top 0.406: R13.1 24.06,21.08 v19.56,21.08
  Bottom 0.406: v19.56,21.08 19.05,20.57 J1.1
N$23  (via drill 0.35)
  Top 0.508: IC3.6 56.39,24.89 v55.5,24
  Bottom 0.508: v55.5,24 57.08,24 R17.1
N$24
  Bottom 0.406: R14.1 16.83,22.1 20.32,22.1 22.86,19.56 J4.3
N$25
  Top 0.305: U1.94 50.35,72.46 R22.1
N$26
  Bottom 0.406: R15.1 25.4,19.88 J4.2
N$27  (via drill 0.35)
  Top 0.406: v17.65,53.34 17.34,53.66 IC4.10
  Bottom 0.406: R23.1 17.97,53.02 v17.65,53.34
N$28
  Bottom 0.406: R16.1 J4.1
N$29  (via drill 0.35)
  Top 0.406: v11.43,50.16 13.02,51.75 IC4.13
  Bottom 0.406: J5.2 10.56,49.3 v11.43,50.16
N$30  (via drill 0.35)
  Top 0.406: IC4.12 12.26,52.39 v12.19,52.32
  Bottom 0.406: v12.19,52.32 12.17,52.3 J5.3
N$31  (via drill 0.35)
  Top 0.406: IC4.14 13.78,51.12 12.57,49.91 v12.57,47.5
  Bottom 0.406: v12.57,47.5 11.38,46.3 J5.1
N$32  (via drill 0.35)
  Top 0.406: IC4.11 12.89,53.02 v11.94,53.98
  Bottom 0.406: v11.94,53.98 10.61,55.3 J5.4
N$33
  Bottom 0.305: 73.32,13.1 R29.1 74.97,14.97 74.97,17.76 | C43.1 74.93,21.22 74.97,21.18 74.97,18.03 74.97,17.76 | R28.1 74.97,17.76
N$59
  Top 0.305: C27.1 R5.1 R6.1
N$113  (via drill 0.35)
  Top 0.305: 38.85,23.5 C25.2 38.71,23.25 C28.+ 41.25,25.4 v43.18,25.4
  Top 0.508: L1.1 43.81,30.23 v43.94,30.1
  Bottom 0.305: 43.81,29.97 v43.94,30.1 | v43.18,25.4 43.81,26.04 U2.3
  Bottom 0.508: U2.3 43.81,29.97
NRST  (via drill 0.35)
  Top 0.305: 38.1,39.24 S1.2 | 43.95,64.27 U1.14 46.87,64.27 v47.62,65.02 | 43.95,64.27 v43.18,63.5 | 32.77,43.25 R21.1 32.7,44.64 v32.51,44.83 | 43.95,64.27 35.06,64.27 34.29,63.5 34.29,58.17 34.42,58.04 34.42,56.77 v33.15,55.5 | v52.45,59.56 56.9,59.56 v57.28,59.18
  Top 0.406: S1.1 32.7,41.47 R21.1 C39.1 35.83,41.52 38.1,39.24
  Bottom 0.305: v47.62,65.02 52.45,60.2 v52.45,59.56 | v33.15,55.5 32.51,54.86 v32.51,44.83 | v57.28,59.18 57.28,42.55 58.55,41.27 SV1.7
PWM1
  Top 0.305: IC4.3 27.11,51.12 28.7,52.7 42.95,52.7 U1.26
PWM2
  Top 0.305: U1.25 43.91,58.77 41.91,56.77 41.91,55.37 39.88,53.34 28.45,53.34 26.86,51.75 IC4.4
PWM3
  Top 0.305: IC4.5 26.48,52.39 28.07,53.98 39.62,53.98 41.27,55.63 41.27,56.9 43.65,59.27 U1.24
PWM4
  Top 0.305: U1.23 43.26,59.77 40.64,57.15 40.64,55.88 39.37,54.61 27.81,54.61 26.23,53.02 IC4.6
RS485_A  (via drill 0.35)
  Top 0.508: v66.8,28.83 68.45,27.18 69.85,27.18 v70.74,28.07
  Bottom 0.508: R17.2 57.62,21.57 D3.1 59.18,19.34 59.18,24.89 60.96,26.67 61.21,26.92 63.12,28.83 v66.8,28.83 | v70.74,28.07 71.12,28.45 JP2.2
RS485_B
  Bottom 0.508: 60.75,21.57 R18.2 62.02,20.98 D3.2 64.64,20.41 64.64,26.04 66.42,27.81 68.07,27.81 68.58,28.32 JP2.1
SPI_MISO  (via drill 0.35)
  Top 0.305: JP1.3 7.37,22.1 10.16,19.3 29.46,19.3 33.15,22.99 v33.15,23.62 | U1.53 60.28,59.77 60.26,59.79 59.09,59.79 57.39,61.49 51.69,61.49 50.77,60.58 50.77,59.79 v50.55,59.56
  Bottom 0.305: v50.55,59.56 50.55,59.13 50.24,58.83 50.24,58.21 51.18,57.28 51.18,50.04 44.45,43.31 44.45,35.43 43.43,34.42 41.78,34.42 38.73,31.37 38.73,29.21 v33.15,23.62
SPI_MOSI  (via drill 0.35)
  Top 0.305: JP1.4 7.11,24.64 8.89,22.86 8.89,21.59 10.41,20.07 28.96,20.07 31.88,22.99 v31.88,23.62 | v49.53,59.69 50.32,60.48 50.32,60.85 51.57,62.1 57.54,62.1 59.38,60.25 61,60.25 U1.54
  Bottom 0.305: v31.88,23.62 35.24,26.99 35.56,27.3 38.1,29.84 38.1,31.62 41.4,34.92 43.18,34.92 43.81,35.56 43.81,43.56 50.55,50.29 50.55,56.9 49.66,57.78 49.66,59.56 v49.53,59.69
SPI_NSS  (via drill 0.35)
  Top 0.305: JP1.1 8.13,17.02 9.02,17.91 30.73,17.91 35.43,22.61 v35.43,23.5 | v52.2,58.55 51.69,59.05 51.69,60.2 52.07,60.58 56.85,60.58 57.96,59.47 57.96,59.46 58.55,58.88 59.88,58.88 59.99,58.77 U1.51
  Bottom 0.305: v35.43,23.5 38.1,26.16 40.26,28.32 40.26,30.73 42.29,32.77 44.32,32.77 45.72,34.16 45.72,42.8 52.45,49.53 52.45,58.29 v52.2,58.55
SPI_SCK  (via drill 0.35)
  Top 0.305: JP1.2 5.97,18.54 30.1,18.54 34.42,22.86 v34.42,23.62 | v50.93,58.55 51.18,58.8 | 51.18,58.8 51.18,58.93 | 51.18,58.8 51.23,58.85 51.23,60.39 51.88,61.04 57.2,61.04 58.9,59.33 60.07,59.33 60.13,59.27 U1.52
  Bottom 0.305: v34.42,23.62 37.34,26.54 39.5,28.7 39.5,31.11 42.04,33.66 43.81,33.66 45.09,34.92 45.09,43.05 51.82,49.78 51.82,57.66 v50.93,58.55
TCK/SWCLK  (via drill 0.35)
  Top 0.305: U1.76 61.78,72.45 v61.98,72.64
  Bottom 0.305: R25.1 71.69,46.35 SV1.4 68.2,45.97 67.31,45.09 60.58,45.09 59.82,45.85 59.82,61.47 59.05,62.23 59.05,69.47 59.05,69.72 v61.98,72.64
TDI  (via drill 0.35)
  Top 0.305: U1.77 58.84,73.83 59.18,74.17 60.45,74.17 v60.83,73.79 | v59.94,43.69 59.94,40.89 v60.45,40.39
  Bottom 0.305: R27.1 68.96,40.51 68.33,41.15 | 68.33,41.15 SV1.8 | 68.33,41.15 67.25,40.07 67.18,40.01 64.9,40.01 64.52,40.39 v60.45,40.39 | v60.83,73.79 60.83,72.39 58.42,69.98 58.42,61.85 59.18,61.09 59.18,44.45 v59.94,43.69
TDO/SWO  (via drill 0.35)
  Top 0.305: U1.89 52.84,73.92 v53.34,74.42
  Bottom 0.305: R26.1 SV1.6 68.2,43.05 67.82,42.67 59.69,42.67 58.55,43.81 58.55,60.71 57.91,61.34 57.78,61.47 57.78,70.99 55.88,72.9 54.86,72.9 v53.34,74.42
TMS/SWDIO  (via drill 0.35)
  Top 0.305: U1.72 61.72,69.27 61.92,69.27 v62.74,68.45
  Bottom 0.305: R24.1 71.06,48.9 SV1.2 | 68.2,49.66 SV1.2 | SV1.2 66.55,50.55 62.48,50.55 60.45,52.58 60.45,66.17 v62.74,68.45
TRST  (via drill 0.35)
  Top 0.305: U1.90 52.34,73.9 v51.82,74.42 | v58.8,42.29 58.8,40.77 v59.18,40.39
  Bottom 0.305: SV1.10 68.2,38.48 67.12,37.4 62.17,37.4 v59.18,40.39 | v51.82,74.42 53.98,72.26 55.37,72.26 57.15,70.48 57.15,60.96 57.91,60.2 57.91,59.51 57.96,59.47 57.96,58.9 57.91,58.85 57.91,43.18 v58.8,42.29
UART_DIR  (via drill 0.35)
  Top 0.305: U1.88 53.34,70.99 v52.96,70.61 | IC3.2 55.12,16.82 R20.2 | IC3.3 IC3.2 | v52.32,21.59 54.48,21.59 55.12,20.95 IC3.2
  Bottom 0.305: v52.96,70.61 55.24,68.33 55.24,48.39 50.55,43.69 50.55,41.15 49.66,40.26 48.26,40.26 47.62,39.62 47.62,26.29 v52.32,21.59
UART_RXD  (via drill 0.35)
  Top 0.305: U1.87 53.84,71 v54.1,70.74 | v51.18,24.13 51.18,21.15 R19.1
  Top 0.406: IC3.1 50.52,20.15 R19.1
  Bottom 0.305: v54.1,70.74 54.1,70.36 55.88,68.58 55.88,49.53 55.88,49.28 55.88,47.88 51.44,43.43 51.44,41.02 50.04,39.62 48.64,39.62 48.26,39.24 48.26,27.05 v51.18,24.13
UART_TXD  (via drill 0.35)
  Top 0.305: U1.86 54.34,71.52 v55.37,70.48 | v52.45,24 53.21,23.24 56.26,23.24 57.66,21.84 IC3.4
  Bottom 0.305: v55.37,70.48 55.37,69.98 56.52,68.83 56.52,47.37 52.07,42.93 52.07,40.64 48.9,37.47 48.9,27.56 v52.45,24